# EAGLE board ECE411_Project1_RE (EAGLE 9.1.3)
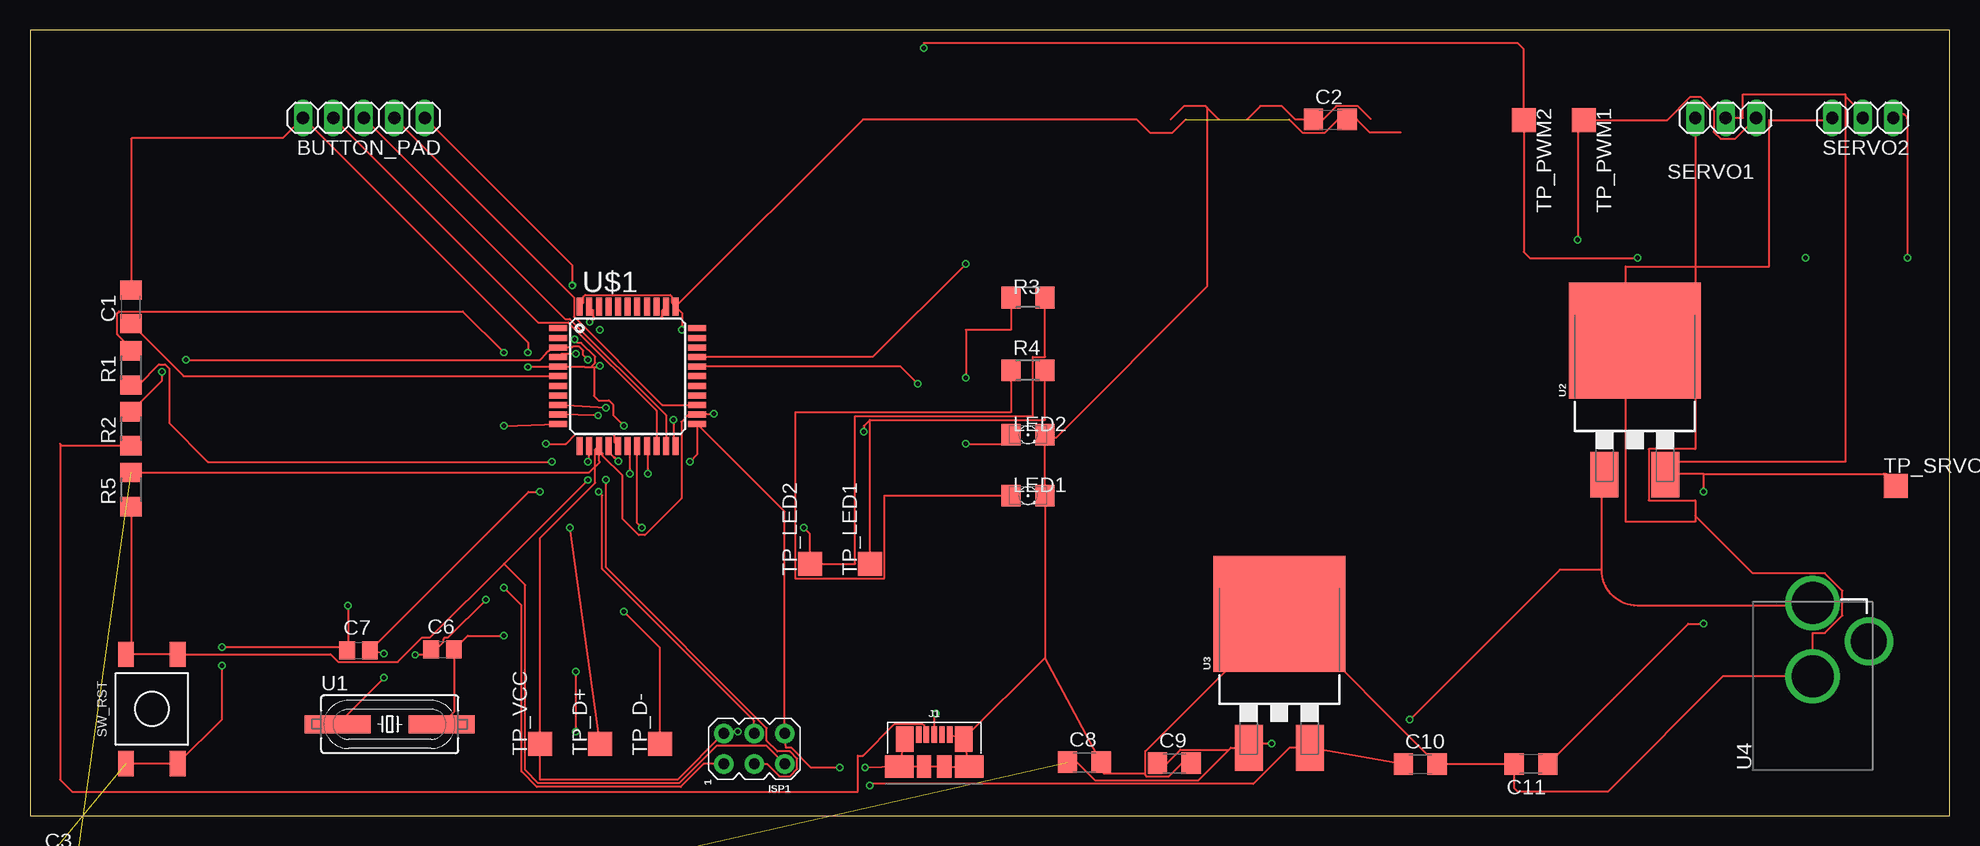
[diagram p0: board, top side]
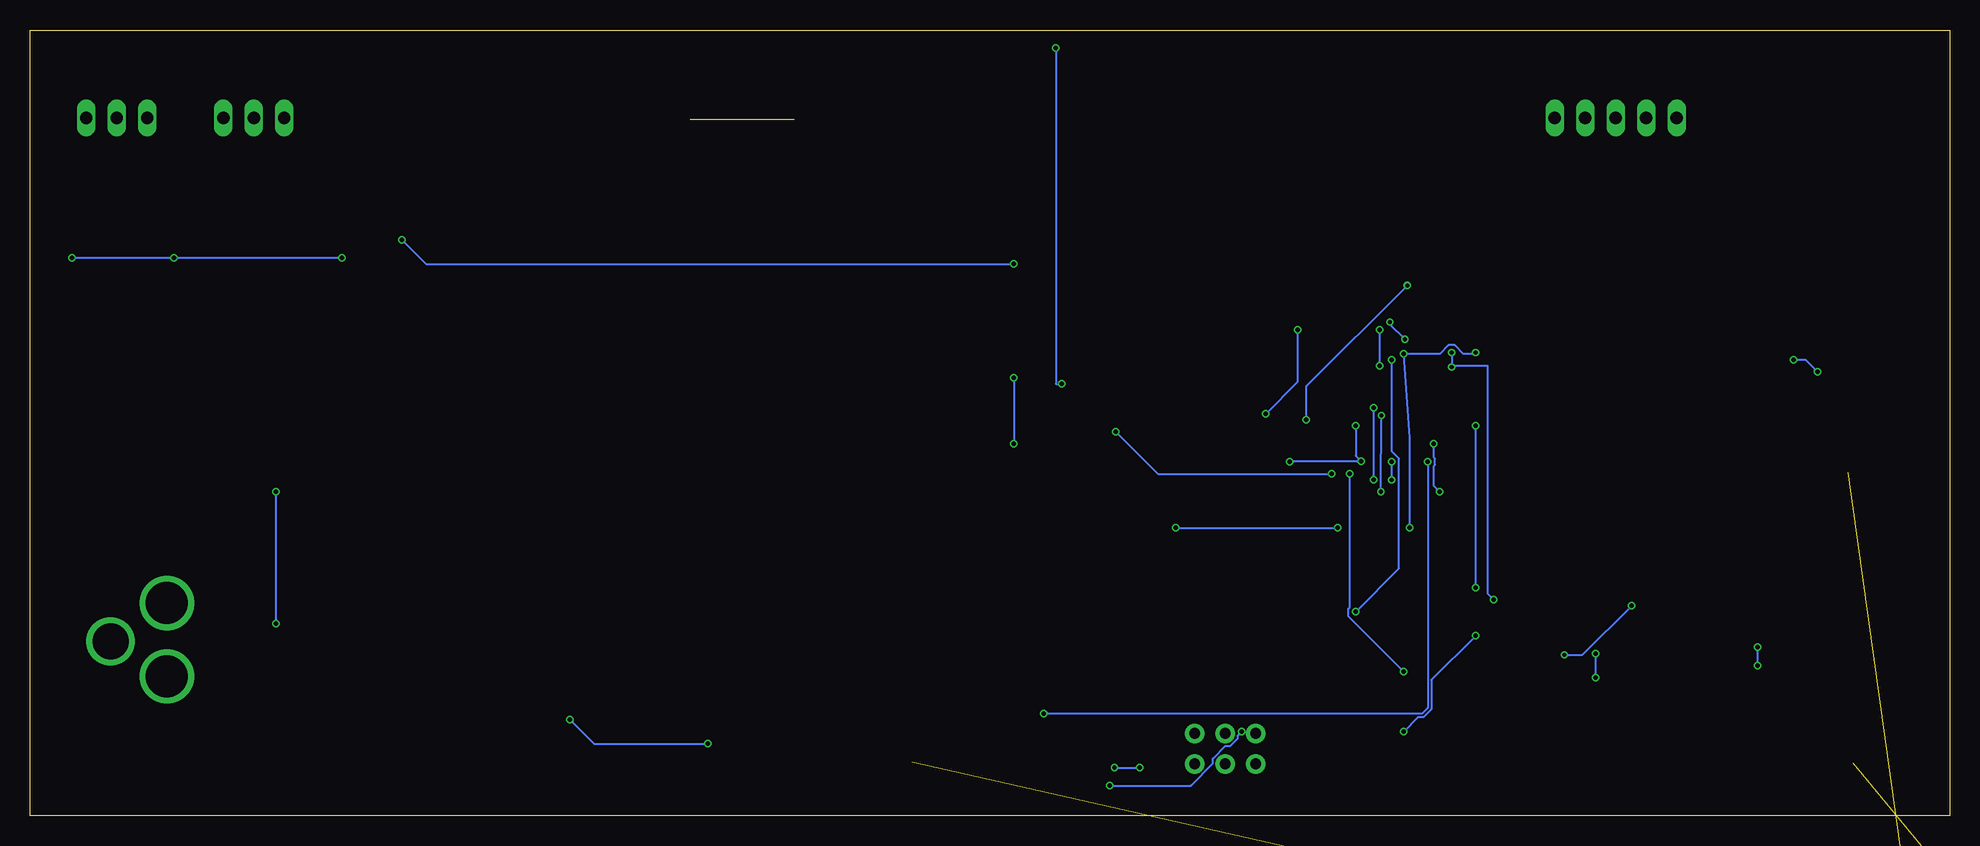
[diagram p1: board, bottom side, seen from below]

Size 160 x 65.5 mm. Coordinates in mm from the lower left corner, seen from the top.
Outline: 0,0 160,0 160,65.5 0,65.5 0,0
Copper layers (1*16): Top 0.035559375mm / dielectric 1.6mm / Bottom 0.035559375mm
Design rules "123": minimum track width 6mil, minimum drill 10mil, track to track 6mil, track to pad 6mil, pad to pad 6mil, via to via 6mil, smd to smd 6mil, copper to edge 15mil, drill to drill 6mil, minimum pad ring 5mil, minimum via ring 5mil, stop-mask expansion 2.5mil, vias tented up to drill 0mil, thermal gap 10mil

## Footprints (pad centres in the part's own frame; a part is rotated, then mirrored left to right if it is on the bottom)
1X05 = drill 1.016 long: 1 -5.08,0; 2 -2.54,0; 3 0,0; 4 2.54,0; 5 5.08,0
C1206 = smd 1.6 x 1.8: 1 -1.4,0; 2 1.4,0
C0805 = smd 1.3 x 1.5: 1 -0.95,0; 2 0.95,0
UD-5X5,4_NICHICON = smd 2.4 x 1: + 1.65,0; - -1.65,0
AVRISP = drill 0.9 pad 1.626: 1 -1.27,2.54; 2 1.27,2.54; 3 -1.27,0; 4 1.27,0; 5 -1.27,-2.54; 6 1.27,-2.54
MOLEX_USBMICRO = smd 1.38 x 0.45: 1 2.66,1.3; 2 2.66,0.65; 3 2.66,0; 4 2.66,-0.65; 5 2.66,-1.3 | smd 1.9 x 1.175: G1 0,0.838; G2 0,-0.838 | smd 2.1 x 1.475: G3 2.3,2.462; G4 2.3,-2.462 | smd 1.9 x 2.375: G5 0,2.913; G6 0,-2.913
1206 = smd 1.6 x 1.803: A -1.422,0; C 1.422,0
R1206 = smd 1.6 x 1.803: 1 -1.422,0; 2 1.422,0
1X03 = drill 1.016 long: 1 -2.54,0; 2 0,0; 3 2.54,0
FSM2JSMLTR = smd 1.3 x 2.1: 1 -2.15,4.55; 2 -2.15,-4.55; 3 2.15,4.55; 4 2.15,-4.55
TP20SQ = smd 2 x 2: TP 0,0
ATS160SM-1 = smd 5.5 x 1.5: 1 -4.326,0; 2 4.326,0
TO-263/D2PAK = smd 2.32 x 3.81: 1 -2.54,-7.045; 3 2.54,-7.045 | smd 11 x 9.65: 2 0,4.125
DCJACK_2.1MM_PTH = drill 3.5: GND 0,7.8; PWR 0,13.9 | drill 3: GNDBREAK 4.7,10.7
TQFP44 = smd 1.5 x 0.5: 1 -5.8,4; 2 -5.8,3.2; 3 -5.8,2.4; 4 -5.8,1.6; 5 -5.8,0.8; 6 -5.8,0; 7 -5.8,-0.8; 8 -5.8,-1.6; 9 -5.8,-2.4; 10 -5.8,-3.2; 11 -5.8,-4; 23 5.8,-4; 24 5.8,-3.2; 25 5.8,-2.4; 26 5.8,-1.6; 27 5.8,-0.8; 28 5.8,0; 29 5.8,0.8; 30 5.8,1.6; 31 5.8,2.4; 32 5.8,3.2; 33 5.8,4 | smd 0.5 x 1.5: 12 -4,-5.8; 13 -3.2,-5.8; 14 -2.4,-5.8; 15 -1.6,-5.8; 16 -0.8,-5.8; 17 0,-5.8; 18 0.8,-5.8; 19 1.6,-5.8; 20 2.4,-5.8; 21 3.2,-5.8; 22 4,-5.8; 34 4,5.8; 35 3.2,5.8; 36 2.4,5.8; 37 1.6,5.8; 38 0.8,5.8; 39 0,5.8; 40 -0.8,5.8; 41 -1.6,5.8; 42 -2.4,5.8; 43 -3.2,5.8; 44 -4,5.8

## Placement (x,y rotation side)
BUTTON_PAD  [1X05]  27.83,58.17 180 top
C1  1u  [C1206]  8.42,42.41 90 top
C2  0.1u  [C1206]  108.39,58.03 0 top
C3  0.1u  [C1206]  2.5,-4 0 top  (outside the outline)
C4  0.1u  [C1206]  2.5,-10.5 0 top  (outside the outline)
C5  0.1u  [C1206]  2.5,-17 0 top  (outside the outline)
C6  22p  [C0805]  34.39,13.86 0 top
C7  22p  [C0805]  27.39,13.78 0 top
C8  0.1u  [C1206]  87.89,4.45 0 top
C9  10u  [C1206]  95.39,4.37 0 top
C10  4.7u  [C1206]  115.89,4.29 0 top
C11  10u  [C1206]  125.11,4.29 180 top
C12  10uF  [UD-5X5,4_NICHICON]  -3.5,-15.5 0 top  (outside the outline)
ISP1  AVRISP-6  [AVRISP]  60.37,5.58 90 top
J1  0473460001_USBMICRO  [MOLEX_USBMICRO]  75.37,4.08 90 top
LED1  [1206]  83.19,26.68 0 top
LED2  [1206]  83.19,31.76 0 top
R1  22  [R1206]  8.42,37.33 90 top
R2  22  [R1206]  8.42,32.25 90 top
R3  1k  [R1206]  83.19,43.19 0 top
R4  1k  [R1206]  83.19,37.11 0 top
R5  10k  [R1206]  8.42,27.17 90 top
SERVO1  [1X03]  141.34,58.17 180 top
SERVO2  [1X03]  152.77,58.17 180 top
SW_RST  FSM2JSMLTR  [FSM2JSMLTR]  10.16,8.89 0 top
TP_D+  TPTP20SQ  [TP20SQ]  47.5,6 90 top
TP_D-  TPTP20SQ  [TP20SQ]  52.5,6 90 top
TP_LED1  TPTP20SQ  [TP20SQ]  70,21 90 top
TP_LED2  TPTP20SQ  [TP20SQ]  65,21 90 top
TP_PWM1  TPTP20SQ  [TP20SQ]  129.5,58 270 top
TP_PWM2  TPTP20SQ  [TP20SQ]  124.5,58 270 top
TP_SRVOPWR  TPTP20SQ  [TP20SQ]  155.5,27.5 0 top
TP_VCC  TPTP20SQ  [TP20SQ]  42.5,6 90 top
U1  ATS160SM-1  [ATS160SM-1]  29.99,7.62 0 top
U2  MIC29310-5.0WU  [TO-263/D2PAK]  133.77,35.47 0 top
U3  NCP5501DT50RKG  [TO-263/D2PAK]  104.14,12.7 0 top
U4  DCJACK_2.1MM_PTH  [DCJACK_2.1MM_PTH]  148.59,3.81 0 top
U$1  ATMEGA32U4-AU  [TQFP44]  49.82,36.63 0 top

## Library data of the parts
BUTTON_PAD SERVO1 SERVO2 = pinhead
C1 C6-C11 = rcl; SPICEPREFIX: C
C2-C5 = rcl; SPICEPREFIX: C; VENDER: Arrow
C12 = ElectrolyticCap
ISP1 J1 = USB_Micro_and_AVRISP
LED1 LED2 = led
R1-R5 = rcl; SPICEPREFIX: R
SW_RST = Push_Button
TP_D+ TP_D- TP_LED1 TP_LED2 TP_PWM1 TP_PWM2 TP_SRVOPWR TP_VCC = BeagleBone_Blue_R3
U1 = Xtals
U2 U3 = Regulators
U4 = DCBARREL_2.1MM
U$1 = adafruit

## Nets
/RST: ISP1.5 R5.1 SW_RST.1 SW_RST.3 U$1.13
D+MCU: R1.2 TP_D+.TP U$1.4
D+USB: J1.3 R1.1
D-MCU: R2.2 TP_D-.TP U$1.3
D-USB: J1.2 R2.1
GND: BUTTON_PAD.5 C1.2 C2.1 C3.1 C4.1 C5.1 C6.1 C7.1 C8.2 C9.2 C10.2 C11.2 C12.- ISP1.6 J1.5 J1.G1 J1.G2 J1.G3 J1.G4 J1.G5 J1.G6 LED1.C LED2.C SERVO1.3 SERVO2.3 SW_RST.2 SW_RST.4 U2.2 U3.2 U4.GND U$1.5 U$1.15 U$1.23 U$1.35 U$1.43
GNDBREAK: U4.GNDBREAK
N$6: R3.2 TP_LED2.TP U$1.18
N$7: BUTTON_PAD.4 U$1.20
N$8: R4.2 TP_LED1.TP U$1.19
N$9: LED2.A R3.1
N$10: LED1.A R4.1
N$11: BUTTON_PAD.3 U$1.21
N$12: BUTTON_PAD.2 U$1.25
N$13: BUTTON_PAD.1 U$1.22
N$16: ISP1.1 U$1.11
N$17: ISP1.4 U$1.10
N$18: ISP1.3 U$1.9
PWM1: SERVO1.1 TP_PWM1.TP U$1.30
PWM2: SERVO2.1 TP_PWM2.TP U$1.29
SERVO_PWR: C11.1 SERVO1.2 SERVO2.2 TP_SRVOPWR.TP U2.3
UCAP: C1.1 U$1.6
UNREG_PWR: C8.1 C9.1 C12.+ U2.1 U3.1 U4.PWR
VBUS: J1.1
VCC: C2.2 C3.2 C4.2 C5.2 C10.1 ISP1.2 R5.2 TP_VCC.TP U3.3 U$1.14 U$1.24 U$1.34 U$1.44
XTAL1: C6.2 U1.2 U$1.17
XTAL2: C7.2 U1.1 U$1.16

## Tracks (layer width: path | path; a pad name or v marks a point on that pad's centre or on a via)
/RST  (via drill 0.35)
  Top 0.152: R5.1 8.42,13.85 8.04,13.46 | 8.04,13.46 SW_RST.1 | 8.04,13.46 8.06,13.44 SW_RST.3 25.06,13.44 25.7,12.8 30.66,12.8 32.7,14.84 33.35,14.84 39.51,20.99 | 39.51,20.99 v46.5,27.98 | v46.5,29.5 46.62,29.62 U$1.13 | ISP1.5 61.41,5.81 57.22,5.81 54.11,2.69 42.37,2.69 41.27,3.8 41.27,19.23 39.51,20.99
  Bottom 0.152: v46.5,27.98 v46.5,29.5
D+MCU  (via drill 0.35)
  Top 0.152: R1.2 8.42,38.99 7.29,40.12 7.29,41.91 7.42,42.04 36.07,42.04 v39.5,38.61 | v45.5,38.5 44.29,38.5 U$1.4 | TP_D+.TP v45,24
  Bottom 0.152: v39.5,38.61 39.61,38.5 40.53,38.5 41.25,39.21 41.75,39.21 42.47,38.5 v45.5,38.5 45,31.5 v45,24
D+USB  (via drill 0.35)
  Top 0.152: v43.5,29.5 14.83,29.5 11.61,32.72 11.61,37.25 11.25,37.61 10.75,37.61 9.05,35.91 R1.1 | v75.5,8.5 75.37,8.37 J1.3
  Bottom 0.152: v43.5,29.5 43.5,9 44,8.5 v75.5,8.5
D-MCU  (via drill 0.35)
  Top 0.152: R2.2 11,36.25 v11,37 | v13,38 42.5,38 43.04,38.54 43.04,38.58 43.17,38.71 43.21,38.71 43.5,39 43.99,39 U$1.3 45.17,39.03 45.25,39.11 45.75,39.11 46.11,38.75 46.11,38.39 v46.5,38 | TP_D-.TP 52.5,14 v49.5,17
  Bottom 0.152: v11,37 12,38 v13,38 | v46.5,38 46.5,30.36 45.89,29.75 45.89,20.61 v49.5,17
D-USB
  Top 0.152: R2.1 2.67,30.83 2.5,31 2.5,3 3.5,2 69,2 69,5 69.42,5 72.08,7.66 74.39,7.66 74.52,7.53 74.52,6.94 J1.2
GND  (via drill 0.35)  (5 unrouted)
  Top 0.152: C1.2 8.42,56.42 8.5,56.5 21.08,56.5 BUTTON_PAD.5 41.5,39.42 v41.5,38.61 | v41.5,37.39 41.54,37.43 U$1.5 46.21,37.43 46.25,37.39 46.75,37.39 | SW_RST.2 SW_RST.4 16,8.03 v16,12.5 | v16,14.05 26.17,14.05 C7.1 26.5,13.84 v26.5,17.5 | 98.12,59.02 98.12,44.12 85.5,31.5 84.61,31.5 | 84.61,13.16 LED1.C 84.61,31.5 | 84.61,13.16 J1.G4 | 111.76,58.08 110.69,59.16 108.89,59.16 107.77,58.03 C2.1 105.46,58.03 104.33,59.16 102.55,59.16 101.42,58.03 | 84.61,31.5 LED2.C | SERVO1.3 138.8,30.56 134.92,30.56 134.92,26.29 138.8,26.29 138.8,25 | 138.8,25 138.8,24.5 133,24.5 133,40.37 | J1.G5 v69.61,4 | v67.5,4 65.12,4 63.47,5.66 63,5.66 ISP1.6 62.91,25.34 U$1.23 55.62,30.12 v55,29.5 | J1.G3 J1.G5 | J1.G4 J1.G6 J1.G2 J1.G1 J1.G5 | J1.5 J1.G4 | 84.61,13.16 C8.2 89.5,3.5 92.84,3.5 92.96,3.38 | 92.96,3.38 93.09,3.24 94.89,3.24 96.01,4.37 C9.2 | 92.96,3.38 92.96,5.37 104.05,16.45 | U3.2 104.14,16.54 104.05,16.45 | U2.2 133,40.37 | 133,40.37 133,45.79 144.97,45.79 144.97,58 150.5,58 150.33,58.17 SERVO2.3 | 138.8,25 143.6,20.2 149.62,20.2 151.08,18.74 151.08,16.68 149.62,15.22 148.6,15.22 148.59,15.21 U4.GND 141.11,11.61 131.5,2 124,2 123.71,2.29 C11.2 C10.2 105.13,16.45 104.05,16.45 | v32.11,13.39 32.97,13.39 C6.1 33.86,13.86 34.46,14.46 34.46,14.71 34.59,14.84 34.84,14.84 v38,18 | v49.04,29.54 48.73,29.85 48.67,29.85 48.22,30.31 U$1.15 | 47.08,41.45 46.94,41.59 46.94,42.11 U$1.43 | U$1.35 52.7,42.11 52.7,41.59 52.56,41.45 47.08,41.45 | 46.75,37.39 47,37.39 | 47,37.39 47.39,37.39 v47.5,37.5 | 46.75,37.39 47.11,37.75 47.11,38.25 45.95,39.41 45.7,39.41 v45.4,39.71 | v46.64,41.14 46.77,41.14 47.08,41.45
  Top 0.152: 47,37.39 47,35 47.39,34.61 48.25,34.61 48.61,34.25 48.61,33.39 v49.5,32.5 | 98.12,59.02 97.98,59.16 96.19,59.16 95.07,58.03 | 99.11,58.03 98.12,59.02
  Bottom 0.152: v41.5,38.61 41.5,37.5 | 41.5,37.5 v41.5,37.39 | v16,12.5 v16,14.05 | v69.61,4 v67.5,4 | v32.11,13.39 30.61,13.39 v26.5,17.5 | v38,18 38.5,18.5 38.5,37.5 41.5,37.5 | v55,29.5 54.96,29.54 v49.04,29.54 49.5,30 v49.5,32.5 | v47.5,37.5 v47.5,40.5 | v45.4,39.71 46.64,40.95 v46.64,41.14
N$6  (via drill 0.35)
  Top 0.152: R3.2 84.61,38.24 83.58,38.24 83.58,33.3 68.77,33.3 68.77,21 TP_LED2.TP 65,23.5 v64.5,24 | v51,24 50.62,24.38 U$1.18
  Bottom 0.152: v64.5,24 v51,24
N$7
  Top 0.152: BUTTON_PAD.4 42.35,41.11 44.87,41.11 52.22,33.75 U$1.20
N$8  (via drill 0.35)
  Top 0.152: TP_LED1.TP 70,33 | R4.2 84.61,33 70,33 | 70,33 69.5,32.5 v69.5,32 | v51.5,28.5 51.5,30.75 U$1.19
  Bottom 0.152: v69.5,32 66,28.5 v51.5,28.5
N$9  (via drill 0.35)
  Top 0.152: R3.1 81.77,40.5 78,40.5 v78,36.5 | v78,31 81.77,31 LED2.A
  Bottom 0.152: v78,36.5 v78,31
N$10
  Top 0.152: R4.1 81.77,33.61 63.77,33.61 63.77,19.77 71.23,19.77 71.23,26.68 LED1.A
N$11
  Top 0.152: BUTTON_PAD.3 44.59,41.41 44.99,41.41 53.02,33.38 U$1.21
N$12
  Top 0.152: BUTTON_PAD.2 45.34,43.2 45.34,41.59 52.7,34.23 U$1.25
N$13  (via drill 0.35)
  Top 0.152: BUTTON_PAD.1 45.2,45.88 v45.2,44.2 | v53.63,33 53.63,31.02 U$1.22
  Bottom 0.152: v45.2,44.2 53.63,35.77 v53.63,33
N$16  (via drill 0.35)
  Top 0.152: ISP1.1 56.15,4.31 54.23,2.39 42.25,2.39 40.97,3.67 40.97,17.53 v39.5,19 | v39.5,32.5 U$1.11
  Bottom 0.152: v39.5,19 v39.5,32.5
N$17  (via drill 0.35)
  Top 0.152: ISP1.4 60.37,7.89 47.7,20.57 47.7,26.7 v47.39,27 | v47.36,33.36 U$1.10
  Bottom 0.152: v47.39,27 v47.36,33.36
N$18  (via drill 0.35)
  Top 0.152: v48,28 48,20.69 61.41,7.28 61.41,6.24 62.3,5.35 63.34,5.35 63.95,4.74 63.95,3.88 63.34,3.27 62.48,3.27 61.44,4.31 ISP1.3 | v48,34 U$1.9
  Bottom 0.152: v48,28 v48,34
PWM1  (via drill 0.35)
  Top 0.152: SERVO1.1 142.13,56.42 140.93,56.42 140.35,57 140.35,58.78 139.21,59.92 138.39,59.92 136.47,58 TP_PWM1.TP 129,57.5 v129,48 | v78,46 70.23,38.23 U$1.30
  Bottom 0.152: v129,48 127,46 v78,46
PWM2  (via drill 0.35)
  Top 0.152: v74.5,64 74.5,64.41 124,64.41 124.5,63.91 TP_PWM2.TP 124.5,47 125,46.5 v134,46.5 | v74,36 72.57,37.43 U$1.29 | SERVO2.1 155.29,58.13 arc-90 155.65,58.5 156,58.5 arc-90 156.5,58 v156.5,46.5
  Bottom 0.152: v74.5,64 74.5,36 v74,36 | v134,46.5 v148,46.5 v156.5,46.5
SERVO_PWR  (via drill 0.35)
  Top 0.152: TP_SRVOPWR.TP arc90 154.5,28.5 139.5,28.5 | 151.32,60 151.32,60.13 142.79,60.13 142.79,58.17 SERVO1.2 | 151.32,60 151.32,29.5 137,29.5 137,29 136.5,29 136.5,28.5 | C11.1 138.22,16 v139.5,16 | v139.5,27 139.5,28.5 | SERVO2.2 152.77,58.55 151.32,60 | 139.5,28.5 137.5,28.5 136.5,28.5 | 136.5,28.5 136.38,28.5 U2.3
  Bottom 0.152: v139.5,16 v139.5,27
UCAP
  Top 0.152: C1.1 12.8,36.63 U$1.6
UNREG_PWR  (via drill 0.35)  (1 unrouted)
  Top 0.152: U4.PWR arc-90 148.38,17.5 134,17.5 arc-90 131,20.5 | 131,20.5 131,28.2 U2.1 | C8.1 87.27,4.45 88.78,2.94 97.38,2.94 99.94,5.5 | 101.5,5.66 100.1,5.66 99.94,5.5 | 101.5,5.66 U3.1 | C9.1 94.77,4.37 95.89,5.5 99.94,5.5 | 131,20.5 127.5,20.5 v115,8 | v103.5,6 101.84,6 101.5,5.66
  Bottom 0.152: v115,8 113,6 v103.5,6
VCC  (via drill 0.35)  (4 unrouted)
  Top 0.152: R5.2 46.59,28.59 47.5,29.5 47.42,29.58 47.42,30.5 | 47.42,30.5 U$1.14 47.11,30.52 47.11,27.73 42.5,23.13 TP_VCC.TP 42.5,3 53.98,3 ISP1.2 57.98,7 v59,7 | U$1.34 69.42,58.03 92.27,58.03 93.39,56.9 95.19,56.9 96.31,58.03 | C10.1 U3.3 104.99,5.66 101.97,2.63 70.13,2.63 v70,2.5 | 47.42,30.5 47.74,30.18 47.74,29.98 49.39,28.33 49.39,24.75 50.75,23.39 51.25,23.39 54.3,26.44 54.3,32.81 54.91,33.43 U$1.24 56.93,33.43 v57,33.5 | U$1.44 46.14,42.75 46.14,43.27 46.27,43.41 53.37,43.41 53.5,43.27 53.5,42.75 U$1.34 | U$1.34 54.34,41.91 v54.34,40.5 | 114.26,56.95 111.69,56.95 110.62,58.03 C2.2 109.01,58.03 107.89,56.9 106.09,56.9 104.97,58.03
  Bottom 0.152: v59,7 59.33,6.67 59.33,6.42 59.94,5.81 60.34,5.81 61.41,4.74 61.41,4.34 63.25,2.5 v70,2.5 | v54.34,40.5 54.34,36.16 v57,33.5
XTAL1  (via drill 0.35)
  Top 0.152: U1.2 35.34,8.64 C6.2 36.48,15 v39.5,15 | v45.5,7 v45.5,12 | v50,28.5 50,30.65 U$1.17
  Bottom 0.152: v39.5,15 43.2,11.3 43.2,8.87 43.87,8.2 44.3,8.2 v45.5,7 | v50,28.5 50,17.36 50.11,17.25 50.11,16.61 v45.5,12
XTAL2  (via drill 0.35)
  Top 0.152: v42.5,27 41.56,27 C7.2 v29.5,13.5 | v43,31 44.67,31 45.48,31.81 48.56,31.81 48.7,31.68 48.7,31.15 U$1.16 | U1.1 v29.5,11.5
  Bottom 0.152: v42.5,27 43,27.5 43,29.14 42.89,29.25 42.89,29.75 43,29.86 v43,31 | v29.5,11.5 v29.5,13.5